# Altium PCB PCB1.PcbDoc (part 3 of 3)
Units mm, origin at the board's own origin, x right, y up, seen from the top; angles counter-clockwise.
Board outline 131.32 x 71.5 mm, 2 copper layers (Top Layer, Bottom Layer); 122 components, 132 nets, 671 pads, 363 vias.
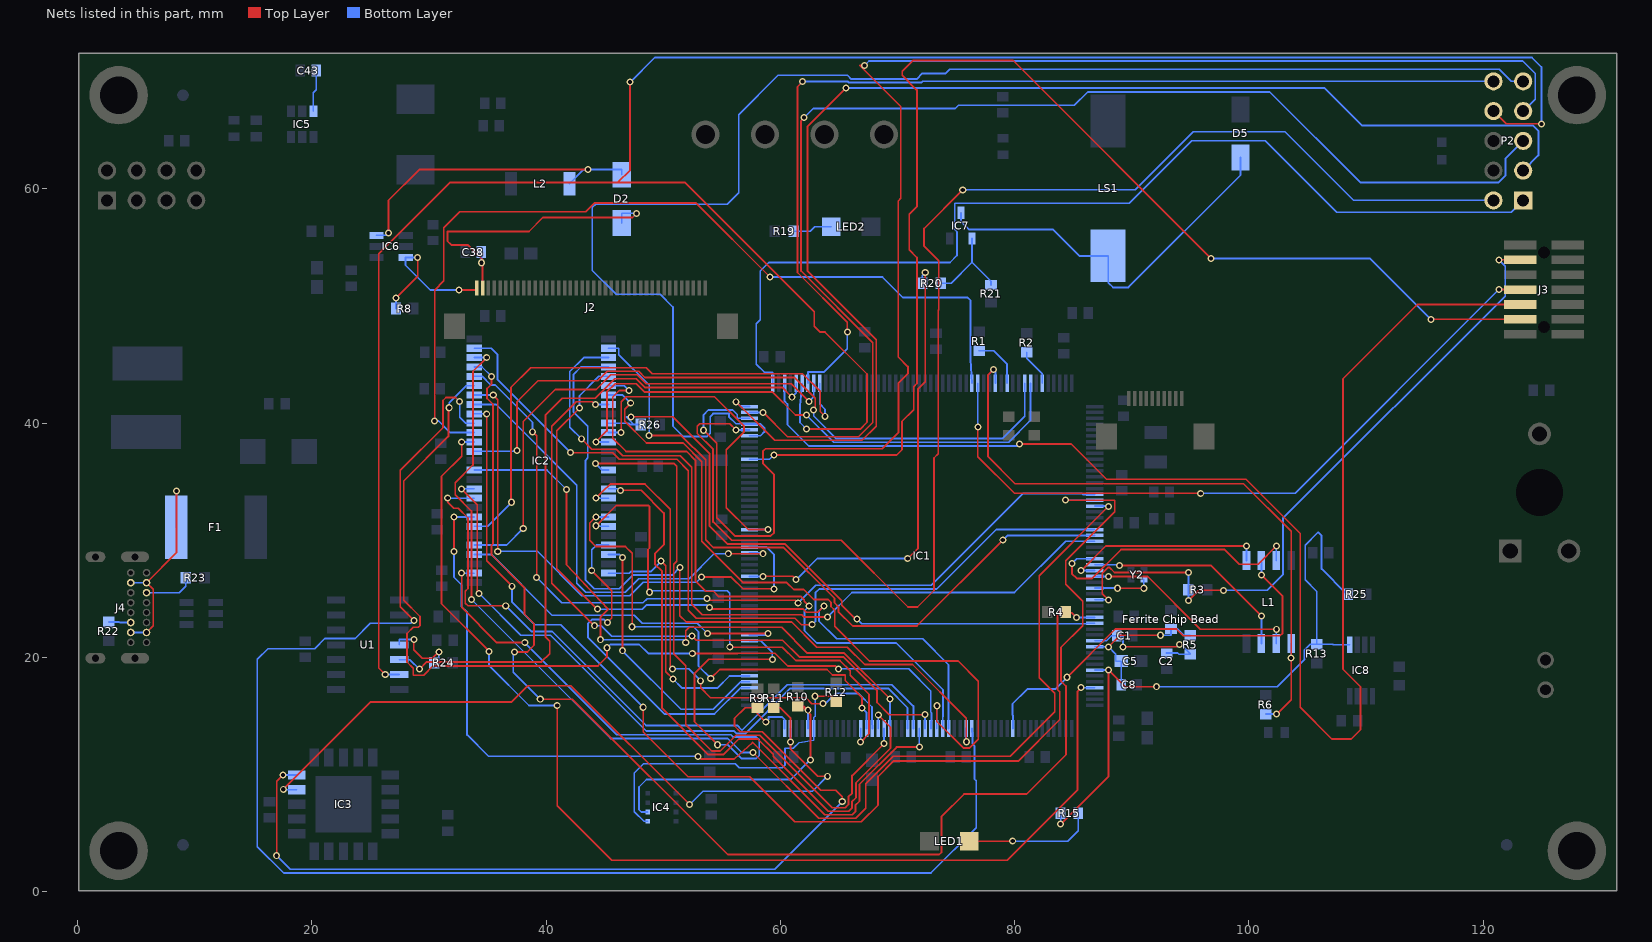
[diagram p3: the nets of this part, all layers, seen from the top]

## Via types
v1: diameter 0.6, hole 0.35, Top Layer to Bottom Layer, 363 vias

## Nets (pads, with @x,y where several pads share a name; then routed paths per layer and width w, separated by ;. In a path a pad name is that pad's centre, name@x,y a point inside that pad or via, vN(x,y) a via of type N, cw(c..) or ccw(c..) an arc to the next point about the centre after c; other vN are vias at no path point) (continued)
NetC43_2: C43.2 IC5.6 | length 3.6
  Bottom Layer w0.15: IC5.6@20.127,66.631 20.127,68.224 20.375,68.472 C43.2@20.375,70.104
NetD2_2: D2.2 IC6.3 L2.2 | length 27.4
  Top Layer w0.15: v1(26.543,56.236) 26.543,59.03 29.159,61.646 v1(43.586,61.646)
  Bottom Layer w0.15: IC6.3@25.514,56.035 26.342,56.035 v1(26.543,56.236) ; L2.2@41.997,60.452 43.167,61.622 43.563,61.622 v1(43.586,61.646) 46.449,61.646 D2.2@46.449,61.199
NetD5_2: D5.2 IC7.3 LS1.2 | length 33.8
  Bottom Layer w0.15: IC7.3@75.405,57.963 75.405,57.226 76.091,56.54 83.261,56.54 85.522,54.28 LS1.2@87.978,54.28 ; LS1.2@87.978,54.288 LS1.2@87.978,54.28 ; D5.2@99.281,62.687 99.281,61.16 89.708,51.587 88.392,51.587 87.978,52.001 LS1.2@87.978,54.28
NetF1_1: F1.1 J4.A4 J4.A9 J4.B4 J4.B9 | length 19.4
  Top Layer w0.15: J4.A9@5.884,22.132 6.452,22.7 6.452,25.814 J4.A4@5.884,26.382 8.433,28.931 v1(8.433,34.217)
  Bottom Layer w0.15: J4.B4@4.534,22.132 J4.A9@5.884,22.132 ; J4.B9@4.534,26.382 J4.A4@5.884,26.382 ; F1.1@8.426,31.115 8.426,34.21 v1(8.433,34.217)
NetIC1_32: IC1.32 Y2.3 | length 4.9
  Top Layer w0.15: v1(88.773,25.908) v1(91.02,25.908)
  Bottom Layer w0.15: IC1.32@86.841,25.919 88.762,25.919 v1(88.773,25.908) ; v1(91.02,25.908) Y2.3@91.02,26.651
NetIC1_34: IC1.34 J3.12 R3.1 | length 59.5
  Top Layer w0.15: v1(88.011,24.919) 87.478,25.452 87.478,27.178 87.986,27.686 88.087,27.686 88.519,27.254 v1(94.844,27.254) ; v1(94.844,24.867) 95.707,25.73 v1(97.841,25.73) ; v1(121.336,53.942) J3.12@123.151,53.942
  Bottom Layer w0.15: IC1.34@86.841,24.919 v1(88.011,24.919) ; v1(94.844,24.867) 94.831,24.879 R3.1@94.831,25.781 94.831,27.242 v1(94.844,27.254) ; v1(97.841,25.73) 101.575,25.73 102.895,27.051 102.895,31.877 121.869,50.851 121.869,53.409 v1(121.336,53.942)
NetIC1_46: IC1.46 IC8.1 R13.2 R15.1 R25.1 | length 56.9
  Top Layer w0.15: v1(83.926,5.766) 88.015,9.855 88.015,18.909 89.424,17.501 v1(92.1,17.501)
  Bottom Layer w0.15: v1(83.926,5.766) R15.1@83.926,6.698 ; IC1.46@86.841,18.919 v1(88.011,18.919) ; v1(92.1,17.501) 102.413,17.501 104.75,19.837 104.75,20.65 105.219,21.12 R13.2@105.791,21.12 ; R25.1@108.42,25.4 108.42,25.451 108.306,25.451 106.197,27.559 106.197,30.404 105.918,30.683 105.893,30.683 104.8,29.591 104.8,26.619 105.791,25.629 R13.2@105.791,21.12 ; IC8.1@108.593,21.09 107.193,21.09 107.163,21.12 R13.2@105.791,21.12
NetIC1_97: IC1.97 IC4.4 R12.2 | length 28.4
  Top Layer w0.15: v1(62.967,16.688) 64.77,16.688 R12.2@64.77,16.218
  Bottom Layer w0.15: IC4.4@48.678,6.006 48.35,6.006 47.523,6.833 47.523,10.135 48.311,10.922 56.142,10.922 56.479,10.585 60.147,10.585 60.401,10.839 60.401,12.241 61.097,12.241 61.581,12.725 62.853,12.929 IC1.97@62.853,13.931 62.853,14.872 62.967,14.986 v1(62.967,16.688)
NetIC1_98: IC1.98 IC4.3 R10.1 | length 25.8
  Top Layer w0.15: R10.1@61.468,15.837 R10.1@61.874,15.837 ; v1(62.357,15.494) 62.014,15.837 R10.1@61.874,15.837 ; v1(62.56,11.252) 62.56,15.151 R10.1@61.874,15.837
  Bottom Layer w0.15: IC4.3@48.678,6.806 48.134,6.806 47.93,7.01 47.93,8.941 48.565,9.576 60.884,9.576 v1(62.56,11.252) ; IC1.98@62.353,13.931 62.353,15.49 v1(62.357,15.494)
NetIC1_101: IC1.101 IC3.9 R11.2 | length 66.2
  Top Layer w0.15: v1(17.56,8.746) 25.019,16.205 37.059,16.205 38.43,17.577 42.113,17.577 v1(52.248,7.442) ; R11.2@59.436,15.71 59.982,15.71 60.853,14.839 v1(60.853,12.766) 60.853,12.197 63.195,9.855 v1(64.008,9.855)
  Bottom Layer w0.15: v1(17.56,8.746) 17.595,8.71 IC3.9@18.7,8.71 ; v1(52.248,7.442) 53.391,8.585 62.738,8.585 v1(64.008,9.855) ; v1(60.853,12.766) IC1.101@60.853,13.931
NetIC1_102: IC1.102 IC3.10 R9.1 | length 78.8
  Top Layer w0.15: v1(16.993,3.073) 16.993,9.427 v1(17.526,9.96) ; v1(58.75,14.478) 58.039,15.189 R9.1@58.039,15.71 56.985,15.71 56.083,14.808 56.083,14.148 56.577,13.654 58.439,13.654 63.431,8.662 64.719,8.662 65.278,8.103 v1(65.278,7.696)
  Bottom Layer w0.15: v1(16.993,3.073) 18.146,1.92 59.501,1.92 v1(65.278,7.696) ; v1(17.526,9.96) IC3.10@18.7,9.96 ; v1(58.75,14.478) 58.978,14.706 58.978,14.91 60.147,14.91 60.353,14.704 IC1.102@60.353,13.931
NetIC1_127: IC1.127 R20.1 | length 40.4
  Top Layer w0.15: v1(58.522,26.924) 61.062,26.924 v1(61.341,26.645) ; v1(70.866,28.448) 71.755,29.337 71.755,42.926 72.365,43.536 v1(72.365,52.857)
  Bottom Layer w0.15: IC1.127@57.365,26.919 58.517,26.919 v1(58.522,26.924) ; v1(61.341,26.645) 63.144,28.448 v1(70.866,28.448) ; R20.1@72.098,51.943 72.098,52.591 v1(72.365,52.857)
NetIC1_151: IC1.151 IC1.153 P2.9 | length 124.9
  Bottom Layer w0.15: IC1.151@57.365,38.919 58.299,38.919 58.634,39.253 58.634,39.604 58.318,39.919 IC1.153@57.365,39.919 56.744,39.919 56.708,39.954 56.21,39.954 55.601,40.564 55.601,40.818 54.254,40.818 54,40.564 54,39.141 53.721,38.862 51.714,38.862 50.825,39.751 50.825,49.911 49.733,51.003 45.974,51.003 43.942,53.035 43.942,58.42 44.221,58.699 55.474,58.699 56.439,59.665 56.439,66.345 59.792,69.698 65.728,69.698 66.049,69.376 71.636,69.376 72.119,69.858 74.11,69.858 74.458,70.206 121.354,70.206 122.377,69.182 P2.9@123.411,69.182
NetIC1_152: IC1.152 P2.2 | length 122
  Top Layer w0.15: v1(56.21,39.421) 55.677,39.954 53.111,39.954 52.908,39.751 52.908,39.116 54.254,37.77 54.254,31.572 55.829,29.997 65.202,29.997 70.891,24.308 71.704,24.308 73.11,25.713 73.11,37.023 73.47,37.384 73.47,49.627 73.508,49.664 73.508,53.867 72.268,55.107 72.268,56.621 v1(75.565,59.919)
  Bottom Layer w0.15: v1(56.21,39.421) 56.212,39.419 IC1.152@57.365,39.419 ; v1(75.565,59.919) 90.297,59.919 95.25,64.872 103.073,64.872 108.923,59.022 P2.2@120.871,59.022
NetIC1_154: IC1.154 P2.7 | length 134.5
  Top Layer w0.15: v1(53.442,39.395) 54.559,38.278 54.559,31.928 56.109,30.378 59.182,30.378 59.461,30.658 59.461,35.611 58.505,36.568 58.505,37.592 58.725,37.812 68.707,37.812 70.07,39.175 70.07,43.409 70.883,44.221 70.883,44.831 70.062,45.652 70.062,58.967 70.282,59.187 70.282,67.031 66.777,70.536 v1(67.183,70.536)
  Bottom Layer w0.15: v1(53.442,39.395) 53.442,40.716 53.848,41.123 55.931,41.123 56.312,40.742 56.312,40.419 IC1.154@57.365,40.419 ; v1(67.183,70.536) 67.564,70.917 123.368,70.917 124.435,69.85 124.435,67.666 P2.7@123.411,66.642
NetIC1_155: IC1.155 P2.5 | length 108.4
  Top Layer w0.15: v1(58.521,40.919) 60.607,38.833 66.662,38.833 67.882,40.053 67.882,46.878 61.76,53 61.76,65.824 v1(62.027,66.091)
  Bottom Layer w0.15: IC1.155@57.365,40.919 v1(58.521,40.919) ; v1(62.027,66.091) 62.797,66.861 74.93,66.861 75.201,67.132 85.09,67.132 86.233,68.275 101.778,68.275 109.499,60.554 121.31,60.554 121.895,61.138 121.895,62.586 P2.5@123.411,64.102
NetIC1_156: IC1.156 P2.3 | length 112.4
  Top Layer w0.15: v1(56.21,41.825) 59.503,38.533 66.962,38.533 68.182,39.753 68.182,47.12 62.306,52.996 62.306,65.32 v1(65.591,68.605)
  Bottom Layer w0.15: v1(56.21,41.825) 56.617,41.419 IC1.156@57.365,41.419 ; v1(65.591,68.605) 106.477,68.605 109.68,65.402 124.257,65.402 124.711,64.948 124.711,62.862 P2.3@123.411,61.562
NetIC1_157: IC1.157 P2.1 | length 86.3
  Bottom Layer w0.15: IC1.157@59.353,43.407 59.353,44.323 58.649,44.323 57.937,45.034 57.937,48.484 58.272,48.819 58.272,52.994 58.999,53.721 74.475,53.721 75.074,54.32 75.074,56.346 74.879,56.54 74.879,58.776 89.789,58.776 95.123,64.11 101.397,64.11 107.493,58.014 122.403,58.014 P2.1@123.411,59.022
NetIC1_161: IC1.161 U1.5 | length 58.6
  Top Layer w0.15: v1(29.183,18.999) 29.806,19.622 39.595,19.622 40.301,20.328 40.301,21.378 39.954,21.726 39.954,40.721 41.359,42.126 44.183,42.126 45.847,43.79 47.69,43.79 48.427,43.053 60.147,43.053 v1(60.985,42.215)
  Bottom Layer w0.15: U1.5@27.465,19.812 28.371,19.812 v1(29.183,18.999) ; v1(60.985,42.215) 61.353,42.582 IC1.161@61.353,43.407
NetIC1_162: IC1.162 P2.8 U1.6 | length 200.1
  Top Layer w0.15: v1(26.264,18.542) 25.705,19.101 25.705,54.458 31.801,60.554 46.126,60.554 ; v1(47.168,69.113) 47.168,61.595 46.126,60.554 ; v1(62.23,39.497) 66.802,39.497 67.386,40.081 67.386,44.196 63.805,47.777 63.398,47.777 62.89,48.285 62.89,49.505 51.841,60.554 46.126,60.554 ; P2.8@120.871,66.642 121.956,65.557 v1(124.968,65.557)
  Bottom Layer w0.15: v1(26.264,18.542) U1.6@27.465,18.542 ; v1(47.168,69.113) 49.276,71.222 124.155,71.222 124.968,70.409 v1(124.968,65.557) ; IC1.162@61.853,43.407 61.671,41.5 61.671,40.056 v1(62.23,39.497)
NetIC1_163: IC1.163 P2.10 | length 88.9
  Top Layer w0.15: v1(61.9,69.164) 61.46,68.724 61.46,52.863 65.71,48.613 v1(65.71,47.798)
  Bottom Layer w0.15: v1(61.9,69.164) 65.758,69.164 65.846,69.076 72.047,69.076 72.153,69.182 P2.10@120.871,69.182 ; IC1.163@62.353,43.407 62.353,44.374 63.729,44.374 65.71,46.355 v1(65.71,47.798)
NetIC1_197: IC1.197 R1.1 | length 4.5
  Bottom Layer w0.15: R1.1@76.962,46.19 78.197,46.19 79.353,45.034 IC1.197@79.353,43.407
NetIC1_203: IC1.203 R2.2 | length 3.2
  Bottom Layer w0.15: R2.2@81.026,46.063 81.026,45.548 82.353,44.221 IC1.203@82.353,43.407
NetIC7_1: IC7.1 R20.2 R21.2 | length 8
  Bottom Layer w0.15: R20.2@73.698,51.943 74.571,51.943 76.355,53.727 ; IC7.1@76.355,55.763 76.355,53.727 ; R21.2@77.978,51.804 77.978,52.104 76.355,53.727
NetJ4_A5: J4.A5 R23.2 | length 4.3
  Bottom Layer w0.15: J4.A5@5.884,25.532 8.679,25.532 9.233,26.086 R23.2@9.233,26.797
NetJ4_B5: J4.B5 R22.2 | length 1.9
  Bottom Layer w0.15: R22.2@2.667,23.025 3.556,23.025 3.599,22.982 J4.B5@4.534,22.982
NetLED1_2: LED1.2 R15.2 | length 11.2
  Top Layer w0.15: LED1.2@76.122,4.318 v1(79.832,4.318)
  Bottom Layer w0.15: v1(79.832,4.318) 84.537,4.318 85.426,5.207 R15.2@85.426,6.698
NetLED2_1: LED2.1 R19.1 | length 3.4
  Bottom Layer w0.15: R19.1@61.125,56.388 62.535,56.388 62.916,56.769 LED2.1@64.34,56.769
NetR24_2: R24.2 U1.4 | length 6.6
  Top Layer w0.15: v1(28.702,21.539) 28.702,20.65 29.43,19.922 30.285,19.922 v1(30.836,20.472)
  Bottom Layer w0.15: U1.4@27.465,21.082 27.465,21.539 v1(28.702,21.539) ; R24.2@30.442,19.558 30.836,19.558 v1(30.836,20.472)
QSPI_CLK: IC1.63 L1.6 | length 35.1
  Top Layer w0.15: v1(84.48,18.309) 88.6,22.428 93.802,22.428 94.386,21.844 102.641,21.844 102.87,22.073 102.87,25.24 v1(101.059,27.051)
  Bottom Layer w0.15: IC1.63@79.853,13.931 79.853,15.067 79.807,15.113 79.807,16.027 81.077,17.297 83.469,17.297 v1(84.48,18.309) ; v1(101.059,27.051) L1.6@101.059,28.282
QSPI_D0: IC1.29 L1.5 | length 17.4
  Top Layer w0.15: v1(85.674,27.407) 87.782,29.515 v1(99.789,29.515)
  Bottom Layer w0.15: v1(85.674,27.407) 85.687,27.419 IC1.29@86.841,27.419 ; L1.5@99.789,28.282 v1(99.789,29.515)
QSPI_D1: IC1.30 L1.2 | length 18.6
  Top Layer w0.15: v1(88.011,26.919) 91.338,26.919 95.855,22.403 v1(102.337,22.403)
  Bottom Layer w0.15: IC1.30@86.841,26.919 v1(88.011,26.919) ; L1.2@102.329,21.182 102.329,22.395 v1(102.337,22.403)
QSPI_D2: IC1.28 L1.3 | length 18.4
  Top Layer w0.15: v1(88.934,27.838) 96.766,27.838 v1(101.059,23.546)
  Bottom Layer w0.15: IC1.28@86.841,27.919 88.854,27.919 v1(88.934,27.838) ; L1.3@101.059,21.182 v1(101.059,23.546)
QSPI_D3: IC1.27 L1.7 | length 24
  Top Layer w0.15: v1(84.887,28.016) 84.887,27.153 85.293,26.746 86.614,26.746 89.078,29.21 97.917,29.21 99.162,27.965 100.787,27.965 v1(102.337,29.515)
  Bottom Layer w0.15: v1(84.887,28.016) 85.29,28.419 IC1.27@86.841,28.419 ; L1.7@102.329,28.282 102.329,29.507 v1(102.337,29.515)
QSPI_NCS: IC1.195 L1.1 R6.2 | length 55.6
  Top Layer w0.15: v1(78.177,44.571) 77.727,44.121 77.727,37.132 80.021,34.838 99.528,34.838 103.599,30.767 v1(103.599,19.955) 103.599,16.401 v1(102.362,15.164)
  Bottom Layer w0.15: v1(78.177,44.571) 78.353,44.395 IC1.195@78.353,43.407 ; R6.2@101.44,15.169 102.357,15.169 v1(102.362,15.164) ; v1(103.599,19.955) L1.1@103.599,21.182
SDRAM_A0: IC1.16 IC2.23 | length 72.7
  Top Layer w0.15: v1(38.839,39.266) 39.192,38.913 v1(39.192,26.822) ; v1(53.746,25.019) 53.873,24.892 61.29,24.892 v1(61.519,24.663)
  Bottom Layer w0.15: IC2.23@33.863,43.997 34.544,43.997 35.28,43.261 35.656,43.261 38.839,40.079 v1(38.839,39.266) ; v1(39.192,26.822) 41.343,24.672 48.272,24.672 48.619,25.019 v1(53.746,25.019) ; v1(61.519,24.663) 63.017,26.162 72.873,26.162 80.696,33.985 85.75,33.985 85.817,33.919 IC1.16@86.841,33.919
SDRAM_A1: IC1.17 IC2.24 | length 121.1
  Top Layer w0.15: v1(35.331,43.993) 35.331,43.332 34.95,42.951 34.95,42.113 35.458,41.605 35.458,29.718 35.331,29.591 35.331,28.753 38.142,25.942 38.142,23.707 38.964,22.885 38.964,21.031 38.405,20.472 v1(37.287,20.472) ; v1(39.497,16.434) 42.24,16.434 55.499,3.175 73.558,3.175 73.762,3.378 73.762,6.426 75.682,8.347 81.016,8.347 84.379,11.709 84.379,17.551 83.955,17.975 83.955,20.862 85.801,22.708 85.801,24.79 84.353,26.238 84.353,28.245 88.544,32.436 88.544,33.426 v1(84.328,33.426)
  Bottom Layer w0.15: IC2.24@33.863,44.797 34.527,44.797 v1(35.331,43.993) ; v1(37.287,20.472) 37.186,20.371 37.186,18.745 v1(39.497,16.434) ; v1(84.328,33.426) 84.328,33.419 IC1.17@86.841,33.419
SDRAM_A2: IC1.18 IC2.25 | length 107.6
  Top Layer w0.15: v1(33.63,24.943) 33.63,32.495 32.241,33.884 32.241,34.922 33.748,36.429 33.748,44.416 v1(34.925,45.593) ; v1(57.658,11.887) 63.274,6.271 66.446,6.271 67.289,7.113 67.289,9.224 69.621,11.557 79.604,11.557 83.414,15.367 83.414,16.935 82.091,18.258 82.091,26.973 v1(88.011,32.893)
  Bottom Layer w0.15: v1(33.63,24.943) 45.491,13.081 55.494,13.081 56.687,11.887 v1(57.658,11.887) ; IC2.25@33.863,45.597 34.921,45.597 v1(34.925,45.593) ; IC1.18@86.841,32.919 87.985,32.919 v1(88.011,32.893)
SDRAM_A3: IC1.22 IC2.26 | length 75.8
  Top Layer w0.15: v1(42.088,37.482) 45.687,37.482 46.25,36.919 51.168,36.919 52.139,35.948 52.139,24.041 52.829,23.35 61.242,23.35 61.795,22.798 v1(62.713,22.798)
  Bottom Layer w0.15: IC2.26@33.863,46.397 35.306,46.397 35.856,45.847 35.856,43.713 v1(42.088,37.482) ; v1(62.713,22.798) 62.984,23.069 62.984,25.51 63.317,25.844 73.342,25.844 78.417,30.919 IC1.22@86.841,30.919
SDRAM_A4: IC1.23 IC2.29 | length 61.9
  Top Layer w0.15: v1(48.793,38.938) 51.545,38.938 53.619,36.863 53.619,30.048 54.288,29.379 60.277,29.379 64.619,25.037 64.619,24.662 64.948,24.333 64.948,23.901 66.167,22.682 71.653,22.682 v1(78.984,30.013)
  Bottom Layer w0.15: IC2.29@45.319,46.397 46.203,46.397 46.203,45.847 48.793,43.256 v1(48.793,38.938) ; v1(78.984,30.013) 79.39,30.419 IC1.23@86.841,30.419
SDRAM_A5: IC1.24 IC2.30 | length 69.6
  Top Layer w0.15: v1(43.02,38.668) 43.906,37.782 45.987,37.782 46.55,37.219 51.446,37.219 52.439,36.226 52.439,24.549 53.337,23.65 61.822,23.65 62.028,23.444 v1(64.008,23.444)
  Bottom Layer w0.15: v1(43.02,38.668) 42.025,39.663 42.025,44.412 43.209,45.597 IC2.30@45.319,45.597 ; v1(64.008,23.444) 66.108,25.544 79.976,25.544 84.351,29.919 IC1.24@86.841,29.919
SDRAM_A6: IC1.71 IC2.31 | length 65.8
  Top Layer w0.15: v1(51.41,27.686) 51.41,23.571 51.955,23.026 60.967,23.026 63.114,20.879 65.72,20.879 67.2,19.398 71.28,19.398 75.87,14.808 v1(75.87,12.802)
  Bottom Layer w0.15: IC2.31@45.319,44.797 42.977,44.797 42.325,44.145 42.325,40.965 43.561,39.729 43.561,37.033 43.366,36.838 43.366,26.6 44.094,25.872 46.237,25.872 47.394,27.028 50.752,27.028 v1(51.41,27.686) ; IC1.71@75.853,13.931 75.853,12.818 v1(75.87,12.802)
SDRAM_A7: IC1.74 IC2.32 | length 63.1
  Top Layer w0.15: v1(42.85,41.28) 40.915,39.345 40.915,27.583 v1(44.378,24.119) ; v1(53.95,24.257) 54.068,24.138 61.934,24.138 62.213,23.859 63.178,23.859 v1(63.703,24.384)
  Bottom Layer w0.15: v1(42.85,41.28) 42.85,42.346 44.501,43.997 IC2.32@45.319,43.997 ; v1(44.378,24.119) 48.204,24.119 48.572,24.488 53.719,24.488 v1(53.95,24.257) ; v1(63.703,24.384) 63.297,23.978 63.297,23.089 64.795,21.59 72.143,21.59 74.353,19.38 IC1.74@74.353,13.931
SDRAM_A8: IC1.75 IC2.33 | length 55.4
  Top Layer w0.15: v1(47.066,42.791) 46.253,42.791 45.695,42.232 45.695,38.71 46.812,37.592 51.985,37.592 52.739,36.839 52.739,26.55 53.641,25.648 54.284,25.648 54.735,25.197 61.773,25.197 62.042,24.927 62.042,24.8 v1(62.459,24.384)
  Bottom Layer w0.15: IC2.33@45.319,43.197 46.66,43.197 v1(47.066,42.791) ; v1(62.459,24.384) 62.052,23.978 62.052,22.276 63.094,21.234 69.875,21.234 73.889,17.221 73.889,14.961 73.853,14.925 IC1.75@73.853,13.931
SDRAM_A9: IC1.76 IC2.34 | length 61.3
  Top Layer w0.15: v1(47.219,41.707) 46.711,41.199 46.711,40.157 48.565,38.303 51.699,38.303 53.289,36.713 53.289,29.927 56.826,26.391 60.542,26.391 61.136,25.797 62,25.797 62.855,24.942 64.092,24.942 64.319,24.714 64.319,24.352 64.643,24.028 64.643,22.649 67.594,19.698 75.171,19.698 76.886,17.983 76.886,13.013 76.149,12.277 75.607,12.277 73.355,14.529 v1(73.355,15.875)
  Bottom Layer w0.15: IC2.34@45.319,42.397 46.528,42.397 v1(47.219,41.707) ; IC1.76@73.353,13.931 73.353,15.873 v1(73.355,15.875)
SDRAM_A10: IC1.77 IC2.22 | length 79.8
  Top Layer w0.15: v1(31.725,41.317) 31.658,41.251 31.658,38.872 27.847,35.06 27.847,24.875 29.227,23.495 29.227,22.716 29.086,22.575 28.651,22.575 28.118,22.042 28.118,19.609 28.658,19.068 28.658,18.474 29.535,18.474 30.34,19.279 44.425,19.279 45.187,20.041 v1(45.187,20.828) ; v1(52.476,20.345) 56.363,20.345 56.38,20.362 59.538,20.362 60.629,19.271 64.727,19.271 v1(64.973,19.025)
  Bottom Layer w0.15: v1(31.725,41.317) 31.725,41.727 33.194,43.197 IC2.22@33.863,43.197 ; v1(45.187,20.828) 45.466,21.107 47.955,21.107 48.717,20.345 v1(52.476,20.345) ; v1(64.973,19.025) 70.942,19.025 72.83,17.137 72.83,15.342 72.898,15.274 72.898,14.554 72.853,14.554 IC1.77@72.853,13.931
SDRAM_A11: IC1.78 IC2.35 | length 57.5
  Top Layer w0.15: v1(44.12,22.708) 40.488,26.34 40.488,39.743 42.571,41.826 43.95,41.826 v1(44.196,41.58) ; v1(52.451,21.819) 52.807,21.463 60.181,21.463 61.601,20.043 65.352,20.043 68.25,17.145 68.25,16.154 69.291,15.113 v1(72.353,15.113)
  Bottom Layer w0.15: v1(44.12,22.708) 44.712,22.708 45.601,21.819 v1(52.451,21.819) ; v1(44.196,41.58) 44.213,41.597 IC2.35@45.319,41.597 ; IC1.78@72.353,13.931 v1(72.353,15.113)
SDRAM_BA0: IC1.131 IC2.20 | length 38.7
  Top Layer w0.15: v1(55.55,28.854) v1(58.522,28.854)
  Bottom Layer w0.15: IC2.20@33.863,41.597 35.738,41.597 42.621,34.714 42.621,26.339 43.389,25.572 46.742,25.572 47.898,26.728 52.204,26.728 54.331,28.854 v1(55.55,28.854) ; IC1.131@57.365,28.919 58.457,28.919 v1(58.522,28.854)
SDRAM_BA1: IC1.132 IC2.21 | length 46.6
  Top Layer w0.15: v1(35.484,42.397) 35.869,42.012 v1(35.869,29.058) ; v1(53.264,26.862) 55.804,26.862 56.808,25.857 v1(59.461,25.857)
  Bottom Layer w0.15: IC2.21@33.863,42.397 v1(35.484,42.397) ; v1(35.869,29.058) 39.264,29.058 43.05,25.272 47.137,25.272 48.294,26.428 52.831,26.428 v1(53.264,26.862) ; IC1.132@57.365,29.419 58.821,29.419 59.461,28.778 v1(59.461,25.857)
SDRAM_CAS: IC1.191 IC2.17 | length 77
  Top Layer w0.15: v1(30.48,40.183) 30.48,51.359 31.267,52.146 31.267,56.667 32.639,58.039 43.383,58.039 44.145,58.801 52.781,58.801 v1(59.106,52.476)
  Bottom Layer w0.15: v1(30.48,40.183) 30.828,40.183 31.814,39.197 IC2.17@33.863,39.197 ; v1(59.106,52.476) 68.707,52.476 70.46,50.724 75.997,50.724 76.225,50.495 76.225,45.441 IC1.191@76.353,43.407
SDRAM_CKE: IC1.38 IC2.37 R26.2 | length 54.9
  Top Layer w0.15: v1(47.244,40.538) 50.821,40.538 53.94,37.419 53.94,31.241 55.502,29.679 60.414,29.679 65.243,24.85 65.243,24.45 66.401,23.292 v1(66.523,23.292)
  Bottom Layer w0.15: IC2.37@45.319,39.997 47.057,39.997 47.176,39.878 47.498,39.878 ; v1(47.244,40.538) 46.838,40.538 47.498,39.878 ; R26.2@48.095,39.878 47.498,39.878 ; v1(66.523,23.292) 66.929,22.885 86.123,22.885 86.157,22.919 IC1.38@86.841,22.919
SDRAM_CLK: IC1.135 IC2.38 | length 28.9
  Top Layer w0.15: v1(46.406,39.192) 46.406,41.842 46.829,42.266 54.373,42.266 56.896,39.743 56.896,39.251 55.372,37.727 55.372,32.791 57.244,30.919 v1(58.928,30.919)
  Bottom Layer w0.15: IC2.38@45.319,39.197 46.401,39.197 v1(46.406,39.192) ; IC1.135@57.365,30.919 v1(58.928,30.919)
SDRAM_CS: IC1.37 IC2.19 R4.2 | length 91.4
  Top Layer w0.15: v1(34.925,40.792) 34.925,28.241 v1(37.092,26.074) ; v1(48.285,15.748) 48.285,13.64 52.108,9.817 57.366,9.817 61.212,5.971 66.906,5.971 68.326,7.391 68.326,9.83 69.647,11.151 80.289,11.151 83.845,14.707 83.845,17.056 83.655,17.246 83.655,23.686 83.845,23.876 R4.2@84.366,23.876 84.366,23.825 84.862,23.825 v1(85.268,23.419)
  Bottom Layer w0.15: IC2.19@33.863,40.797 34.92,40.797 v1(34.925,40.792) ; v1(37.092,26.074) 37.092,24.714 39.023,22.783 41.25,22.783 v1(48.285,15.748) ; v1(85.268,23.419) IC1.37@86.841,23.419
SDRAM_D0: IC1.116 IC2.2 | length 56.6
  Top Layer w0.15: v1(32.785,27.197) 32.785,24.274 35.793,21.265 v1(38.176,21.265) ; v1(54.635,12.548) 52.654,14.529 52.654,18.618 53.873,19.837 v1(59.309,19.837)
  Bottom Layer w0.15: v1(32.785,27.197) IC2.2@33.863,27.197 ; v1(38.176,21.265) 46.043,13.399 55.776,13.399 55.974,13.201 57.945,13.201 58.183,12.962 58.183,11.633 57.912,11.362 56.684,11.362 55.499,12.548 v1(54.635,12.548) ; IC1.116@57.365,21.419 58.318,21.419 59.309,20.428 v1(59.309,19.837)
SDRAM_D1: IC1.117 IC2.4 | length 29.5
  Top Layer w0.15: v1(53.772,22.047) v1(58.927,22.047)
  Bottom Layer w0.15: IC2.4@33.863,28.797 35.297,28.797 40.5,23.594 47.517,23.594 48.192,22.919 52.9,22.919 v1(53.772,22.047) ; IC1.117@57.365,21.919 58.799,21.919 v1(58.927,22.047)
SDRAM_D2: IC1.164 IC2.5 | length 42.6
  Top Layer w0.15: v1(38.044,31.014) 38.044,40.144 40.776,42.876 44.265,42.876 45.522,44.132 47.772,44.132 48.532,43.372 60.908,43.372 v1(62.447,41.834)
  Bottom Layer w0.15: IC2.5@33.863,29.597 36.627,29.597 v1(38.044,31.014) ; v1(62.447,41.834) 62.853,42.24 IC1.164@62.853,43.407
SDRAM_D3: IC1.165 IC2.7 | length 47.1
  Top Layer w0.15: v1(37.059,33.249) 36.991,33.316 36.991,43.041 38.682,44.732 48.531,44.732 49.042,44.221 61.889,44.221 63.398,42.712 63.398,40.996 v1(63.805,40.589)
  Bottom Layer w0.15: IC2.7@33.863,31.197 35.007,31.197 v1(37.059,33.249) ; IC1.165@63.353,43.407 63.353,41.648 63.805,41.196 v1(63.805,40.589)
SDRAM_D4: IC1.79 IC2.8 | length 68.6
  Top Layer w0.15: v1(32.131,29.032) v1(32.131,32.004) ; v1(52.959,11.557) 53.188,11.328 56.046,11.328 57.624,12.74 63.793,6.571 66.142,6.571 66.403,6.833 66.403,7.382 66.754,7.732 66.754,9.179 69.919,12.344 v1(71.882,12.344)
  Bottom Layer w0.15: v1(32.131,29.032) 32.131,26.848 32.774,26.204 32.774,24.336 33.249,23.861 33.249,13.386 35.077,11.557 v1(52.959,11.557) ; v1(32.131,32.004) 32.138,31.997 IC2.8@33.863,31.997 ; IC1.79@71.853,13.931 71.853,12.373 v1(71.882,12.344)
SDRAM_D5: IC1.80 IC2.10 | length 59.3
  Top Layer w0.15: v1(31.598,33.604) 31.598,33.249 32.106,32.741 32.487,32.741 33.325,31.902 33.325,25.883 33.096,25.654 33.096,24.638 33.325,24.409 v1(36.551,24.409)
  Bottom Layer w0.15: v1(31.598,33.604) 31.605,33.597 IC2.10@33.863,33.597 ; v1(36.551,24.409) 38.735,22.225 40.496,22.225 48.522,14.199 56.32,14.199 56.718,13.801 60.596,17.678 69.52,17.678 71.353,15.845 IC1.80@71.353,13.931
SDRAM_D6: IC1.81 IC2.11 | length 56.2
  Top Layer w0.15: v1(32.766,34.397) 34.112,33.051 34.112,25.62 v1(34.265,25.468)
  Bottom Layer w0.15: v1(32.766,34.397) IC2.11@33.863,34.397 ; v1(34.265,25.468) 37.832,21.901 40.375,21.901 48.565,13.711 56.063,13.711 56.274,13.501 56.983,13.501 60.838,17.355 69.208,17.355 70.853,15.71 IC1.81@70.853,13.931
SDRAM_D7: IC1.84 IC2.13 | length 54
  Top Layer w0.15: v1(41.732,34.341) 41.732,27.94 45.288,24.105 44.645,23.461 v1(44.645,21.514) ; v1(51.918,21.285) 51.918,22.276 52.222,22.581 60.096,22.581 62.306,20.371 65.448,20.371 v1(69.353,16.466)
  Bottom Layer w0.15: IC2.13@33.863,35.997 40.076,35.997 v1(41.732,34.341) ; v1(44.645,21.514) 51.689,21.514 v1(51.918,21.285) ; IC1.84@69.353,13.931 v1(69.353,16.466)
SDRAM_D8: IC1.85 IC2.42 | length 56.8
  Top Layer w0.15: v1(44.221,36.551) 50.927,36.551 51.156,36.322 51.156,28.211 50.885,27.94 50.885,20.312 51.918,19.279 51.918,14.246 54.149,12.014 54.864,12.014 56.204,13.354 58.248,13.354 64.431,7.171 65.532,7.171 65.803,7.442 65.803,8.103 66.116,8.416 66.116,9.912 v1(68.853,12.649)
  Bottom Layer w0.15: v1(44.221,36.551) 44.775,35.997 IC2.42@45.319,35.997 ; v1(68.853,12.649) IC1.85@68.853,13.931
SDRAM_D9: IC1.86 IC2.44 | length 54.9
  Top Layer w0.15: v1(46.355,34.265) 48.108,34.265 50.05,32.322 50.05,29.621 49.284,28.855 49.284,27.965 49.895,27.355 49.895,15.668 53.854,11.709 55.11,11.709 56.441,13.04 58.08,13.04 59.387,11.733 59.387,11.569 64.085,6.871 65.837,6.871 66.103,7.137 66.103,7.682 66.454,8.032 66.454,9.304 69.393,12.243 69.393,14.048 v1(68.353,15.088)
  Bottom Layer w0.15: IC2.44@45.319,34.397 46.223,34.397 v1(46.355,34.265) ; IC1.86@68.353,13.931 v1(68.353,15.088)
SDRAM_D10: IC1.87 IC2.45 | length 43.8
  Top Layer w0.15: v1(44.247,33.597) 44.838,34.188 45.466,34.798 48.438,34.798 50.585,32.651 50.585,19.215 v1(50.775,19.025) ; v1(53.188,18.009) 53.188,17.399 54.026,16.561 62.179,16.561 62.687,16.053 v1(63.627,16.053)
  Bottom Layer w0.15: v1(44.247,33.597) IC2.45@45.319,33.597 ; v1(50.775,19.025) 52.172,19.025 v1(53.188,18.009) ; v1(63.627,16.053) 63.83,16.053 64.694,16.916 66.675,16.916 67.818,15.773 67.818,14.564 IC1.87@67.853,13.931
SDRAM_D11: IC1.88 IC2.47 | length 41.2
  Top Layer w0.15: v1(44.24,31.997) 43.722,31.479 43.722,29.997 44.255,29.464 46.772,29.464 47.346,28.891 v1(47.346,22.619) ; v1(54.051,18.212) 54.811,18.971 63.977,18.971 64.448,18.5 65.532,18.5 65.532,18.034 66.954,16.612 v1(66.954,15.672)
  Bottom Layer w0.15: v1(44.24,31.997) IC2.47@45.319,31.997 ; v1(47.346,22.619) 52.58,22.619 53.006,22.194 53.006,19.257 v1(54.051,18.212) ; v1(66.954,15.672) 67.353,15.273 IC1.88@67.353,13.931
SDRAM_D12: IC1.89 IC2.48 | length 44.7
  Top Layer w0.15: v1(44.272,31.242) 45.999,32.969 48.743,32.969 48.819,32.893 48.819,29.344 48.684,29.21 48.684,25.7 v1(48.819,25.566) ; v1(55.677,20.879) 60.169,20.879 61.305,19.743 65.077,19.743 65.953,18.867 65.953,18.471 67.564,16.86 67.564,13.487 v1(66.853,12.776)
  Bottom Layer w0.15: v1(44.272,31.242) 44.317,31.197 IC2.48@45.319,31.197 ; v1(48.819,25.566) 48.941,25.688 55.474,25.688 55.677,25.485 v1(55.677,20.879) ; v1(66.853,12.776) IC1.89@66.853,13.931
SDRAM_D13: IC1.108 IC2.50 | length 29.2
  Top Layer w0.15: v1(43.891,27.407) 45.609,25.689 45.609,23.366 v1(45.221,22.978)
  Bottom Layer w0.15: v1(43.891,27.407) 43.891,29.185 44.304,29.597 IC2.50@45.319,29.597 ; v1(45.221,22.978) 44.966,23.233 43.891,23.233 43.58,22.921 43.58,21.685 50.088,15.177 54.369,15.177 56.611,17.419 IC1.108@57.365,17.419
SDRAM_D14: IC1.109 IC2.51 | length 23.2
  Top Layer w0.15: v1(46.507,20.574) v1(46.507,28.524)
  Bottom Layer w0.15: IC2.51@45.319,28.797 46.235,28.797 v1(46.507,28.524) ; v1(46.507,20.574) 51.511,15.57 54.254,15.57 56.603,17.919 IC1.109@57.365,17.919
SDRAM_D15: IC1.110 IC2.53 | length 22.7
  Top Layer w0.15: v1(49.809,28.219) 50.216,27.813 50.216,18.771 v1(50.825,18.161)
  Bottom Layer w0.15: IC2.53@45.319,27.197 47.094,27.197 47.225,27.328 48.918,27.328 v1(49.809,28.219) ; v1(50.825,18.161) 51.587,17.399 54.635,17.399 55.655,18.419 IC1.110@57.365,18.419
SDRAM_LDQM: IC1.200 IC2.15 | length 59.3
  Top Layer w0.15: v1(37.516,37.668) 37.516,41.826 39.302,43.612 44.399,43.612 45.219,44.432 47.896,44.432 48.437,43.891 61.214,43.891 62.972,42.134 62.972,41.255 v1(62.84,41.123)
  Bottom Layer w0.15: IC2.15@33.863,37.597 37.445,37.597 v1(37.516,37.668) ; v1(62.84,41.123) 62.84,40.615 64.77,38.684 78.931,38.684 80.853,40.606 IC1.200@80.853,43.407
SDRAM_RAS: IC1.70 IC2.18 | length 128.5
  Top Layer w0.15: v1(28.702,23.165) 27.547,24.32 27.547,35.977 31.191,39.622 31.191,41.935 31.445,42.189 32.258,42.189 v1(32.614,41.834)
  Bottom Layer w0.15: v1(28.702,23.165) 28.448,22.911 24.994,22.911 23.698,21.615 21.107,21.615 20.244,20.752 16.256,20.752 15.342,19.837 15.342,3.853 17.595,1.6 72.847,1.6 76.708,5.461 76.708,9.475 76.56,9.623 76.56,12.467 76.403,12.624 76.403,13.614 76.353,13.614 IC1.70@76.353,13.931 ; v1(32.614,41.834) 32.614,40.505 33.122,39.997 IC2.18@33.863,39.997
SDRAM_UDQM: IC1.201 IC2.39 | length 48.2
  Top Layer w0.15: v1(44.247,38.397) 45.187,39.337 45.187,42.672 45.889,43.374 47.681,43.374 48.383,42.672 59.309,42.672 61.283,40.698 v1(62.22,40.698)
  Bottom Layer w0.15: v1(44.247,38.397) IC2.39@45.319,38.397 ; v1(62.22,40.698) 64.539,38.379 79.493,38.379 81.353,40.239 IC1.201@81.353,43.407
SDRAM_WE: IC1.49 IC2.16 | length 97.2
  Top Layer w0.15: v1(32.791,38.405) 32.791,37.186 31.064,35.458 31.064,24.587 v1(35.128,20.523) ; v1(40.945,15.9) 40.945,7.341 45.593,2.692 79.35,2.692 85.369,8.712 85.369,17.12 v1(85.674,17.424)
  Bottom Layer w0.15: v1(32.791,38.405) 32.799,38.397 IC2.16@33.863,38.397 ; v1(35.128,20.523) 35.128,19.304 38.532,15.9 v1(40.945,15.9) ; v1(85.674,17.424) 85.68,17.419 IC1.49@86.841,17.419
SWCLK: IC1.159 J3.6 | length 121.2
  Top Layer w0.15: v1(80.416,38.227) 84.811,38.227 87.833,35.204 99.746,35.204 104.369,30.582 104.369,15.748 107.086,13.03 108.712,13.03 109.525,13.843 109.525,17.501 108.026,18.999 108.026,43.79 114.369,50.132 J3.6@123.151,50.132
  Bottom Layer w0.15: IC1.159@60.353,43.407 60.353,41.882 60.604,41.631 60.604,39.878 62.433,38.049 80.239,38.049 v1(80.416,38.227)
SWDIO: IC1.147 J3.4 | length 109.5
  Top Layer w0.15: v1(59.436,37.287) 69.926,37.287 70.378,37.739 70.378,40.152 71.374,41.148 71.374,43.104 71.653,43.383 71.653,54.145 71.001,54.797 71.001,57.836 71.653,58.488 71.653,68.438 70.392,69.699 70.392,70.036 71.323,70.968 79.858,70.968 v1(96.774,54.051) ; v1(115.527,48.862) J3.4@123.151,48.862
  Bottom Layer w0.15: IC1.147@57.365,36.919 59.068,36.919 v1(59.436,37.287) ; v1(96.774,54.051) 110.338,54.051 v1(115.527,48.862)
SWO: IC1.192 J3.8 | length 61.1
  Top Layer w0.15: v1(76.853,39.675) 76.853,37.142 79.985,34.011 v1(95.879,34.011) ; v1(121.336,51.41) 121.343,51.402 J3.8@123.151,51.402
  Bottom Layer w0.15: v1(76.853,39.675) IC1.192@76.853,43.407 ; v1(95.879,34.011) 103.937,34.011 v1(121.336,51.41)
VDDA: "Ferrite Chip Bead.2" C5.1 C8.2 IC1.42 R5.2 | length 13.3
  Top Layer w0.15: v1(88.011,20.904) 89.002,21.895 v1(92.456,21.895)
  Bottom Layer w0.15: IC1.42@86.841,20.919 87.996,20.919 v1(88.011,20.904) 88.635,20.28 88.635,19.685 C5.1@89.089,19.685 89.089,18.654 89.099,18.644 C8.2@89.099,17.653 ; v1(92.456,21.895) 93.345,21.895 93.345,22.441 93.878,22.441 94.437,21.882 R5.2@94.996,21.882
VLED+: C38.2 D2.1 J2.2 | length 26.8
  Top Layer w0.15: v1(34.468,53.696) v1@34.567,53.596 ; J2.2@34.567,51.529 v1@34.567,53.596 ; v1(47.727,57.912) 47.371,57.556 39.726,57.556 38.532,56.363 31.572,56.363 31.572,55.55 31.902,55.22 33.322,55.22 34.567,53.975 v1@34.567,53.596
  Bottom Layer w0.15: v1(34.468,53.696) 34.472,53.7 C38.2@34.472,54.61 ; D2.1@46.449,57.099 46.449,57.912 v1(47.727,57.912)
VLED–: IC6.6 J2.1 R8.2 | length 13.9
  Top Layer w0.15: v1(27.19,50.699) 29.032,52.541 v1(29.032,54.135) ; v1(32.563,51.359) 34.067,51.359 J2.1@34.067,51.529
  Bottom Layer w0.15: R8.2@27.19,49.784 v1(27.19,50.699) ; v1(29.032,54.135) IC6.6@28.014,54.135 27.991,54.135 27.991,53.492 30.124,51.359 v1(32.563,51.359)
VREF+: C1.2 C2.2 IC1.41 R5.1 | length 11.8
  Top Layer w0.15: v1(89.256,20.904) 93.853,20.904 v1(94.056,21.107)
  Bottom Layer w0.15: IC1.41@86.841,21.419 87.835,21.419 88.26,21.844 C1.2@88.718,21.844 89.256,21.844 v1(89.256,20.904) ; C2.2@92.964,20.375 93.929,20.375 94.022,20.282 R5.1@94.996,20.282 94.996,20.32 94.209,21.107 v1(94.056,21.107)
pads on no net: IC1.1 IC1.2 IC1.6 IC1.7 IC1.8 IC1.13 IC1.19 IC1.20 IC1.31 IC1.33 IC1.36 IC1.43 IC1.45 IC1.47 IC1.48 IC1.53 IC1.54 IC1.56 IC1.64 IC1.67 IC1.68 IC1.69 IC1.95 IC1.96 IC1.99 IC1.100 IC1.104 IC1.105 IC1.106 IC1.107 IC1.111 IC1.112 IC1.113 IC1.118 IC1.119 IC1.120 IC1.121 IC1.122 IC1.123 IC1.126 IC1.128 IC1.129 IC1.130 IC1.134 IC1.138 IC1.141 IC1.142 IC1.146 IC1.160 IC1.166 IC1.168 IC1.169 IC1.173 IC1.174 IC1.175 IC1.176 IC1.177 IC1.178 IC1.186 IC1.187 IC1.193 IC1.194 IC1.196 IC1.206 IC1.207 IC1.208 IC2.36 IC2.40 IC3.1 IC3.2 IC3.3 IC3.4 IC3.5 IC3.8 IC3.11 IC3.12 IC3.13 IC3.14 IC3.15 IC3.16 IC3.17 IC3.18 IC8.7 J3.1 J3.2 J3.9 J3.10 J3.13 J3.14 J3.15 J3.16 J4.A8 J4.B8 J15.3 J15.5 J15.7 L1.4 P1.3 P1.4 P1.5 U1.2 U1.3 U1.7 U1.8 U1.9 U1.10 VR1.MH1

## Polygon pours and split planes (outlines as drawn)
GND on Top Layer "GND_L01_P000" (solid, pour order 0): 0.094,0.094 0.094,71.595 131.412,71.595 131.412,0.094
GND on Bottom Layer "GND_L02_P001" (solid, pour order 1): 0.094,0.094 0.094,71.595 131.412,71.595 131.412,0.094

## Silkscreen, mask and mechanical layers (free items; w line width, h text height)
Top Overlay:
  lines w0.254: 1.016,37.592 11.557,37.592 11.557,56.769 1.016,56.769 1.016,37.592 ; 12.192,3.429 117.612,3.429 117.612,70.499 12.192,70.499 12.192,3.429
  text "Display 4\"3" at 62.865,51.975 h1.52
Mechanical 1:
  lines w0.254: -0.016,-4.577 -0.017,-4.069 ; 1.507,-3.813 -0.016,-4.323 ; 1.508,-4.829 -0.016,-4.323 ; 57.174,-4.268 -0.016,-4.323 ; 74.238,-4.251 131.429,-4.196 ; 129.904,-3.689 131.429,-4.196 ; 129.905,-4.705 131.429,-4.196 ; 131.429,-4.45 131.428,-3.942 ; 134.577,69.994 135.079,71.52 ; 134.82,1.795 135.333,0.273 ; 134.825,71.519 135.333,71.521 ; 135.079,0.272 135.587,0.274 ; 135.178,43.793 135.079,71.52 ; 135.234,28 135.333,0.273 ; 135.593,69.998 135.079,71.52 ; 135.836,1.799 135.333,0.273
  text "71.247 (mm)" at 134.265,43.536 h1.52 r270.2
  text "131.445 (mm)" at 57.429,-5.181 h1.52 r0.06

## Text inside footprints (layer, text, board x,y; h text height)
J4: Mechanical 13 "PCB EDGE" at -0.046,18.942 h0.81 r270
P3: Assembly Notes "Stencil thickness : 120 μm" at 66.372,59.691 h1